# EAGLE board attiny85 (EAGLE 7.6.0)
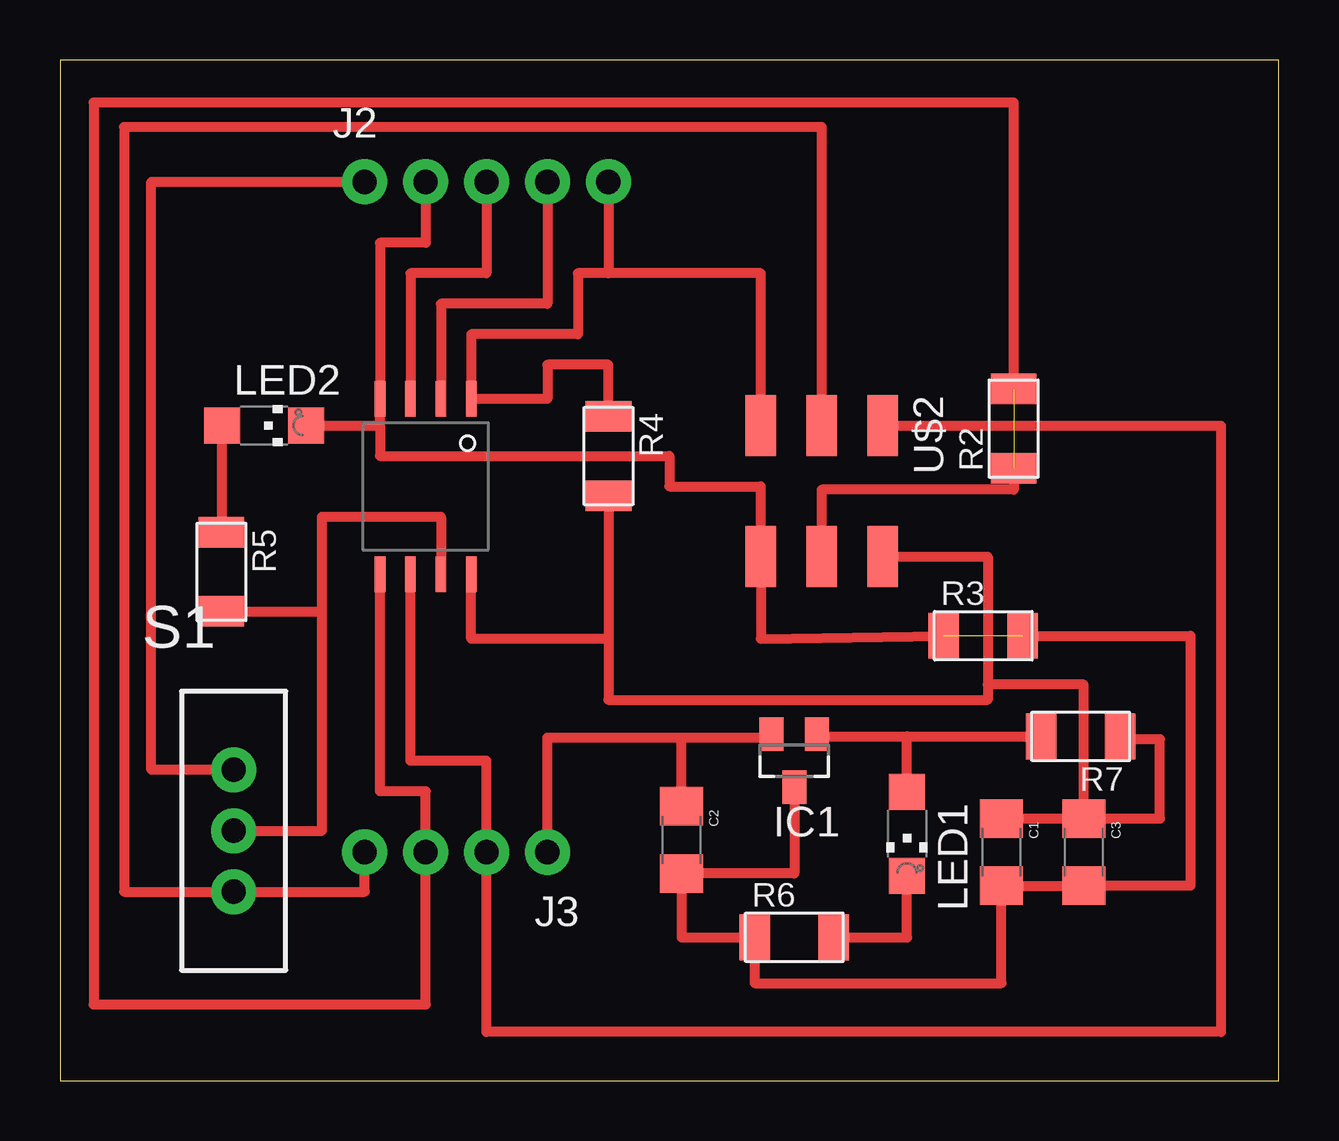
[diagram p0: board, top side]

Size 50.8 x 42.54 mm. Coordinates in mm from the lower left corner, seen from the top.
Outline: 0,0 50.8,0 50.8,42.54 0,42.54 0,0
Copper layers (1*16): Top 0.035mm / dielectric 1.5mm / Bottom 0.035mm
Design rules "default": minimum track width 10mil, minimum drill 24mil, track to track 8mil, track to pad 8mil, pad to pad 8mil, via to via 8mil, smd to smd 8mil, copper to edge 40mil, drill to drill 8mil, minimum pad ring 10mil, minimum via ring 8mil, stop-mask expansion 4mil, vias tented up to drill 0mil, thermal gap 10mil

## Footprints (pad centres in the part's own frame; a part is rotated, then mirrored left to right if it is on the bottom)
1206 = smd 1.6 x 1.8: 1 -1.4,0; 2 1.4,0
SOT23 = smd 1 x 1.4: 1 -0.95,-1.1; 2 0.95,-1.1; 3 0,1.1
1X05_NO_SILK = drill 1.016 pad 1.88: 1 0,0; 2 2.54,0; 3 5.08,0; 4 7.62,0; 5 10.16,0
1X04_NO_SILK_ALL_ROUND = drill 1.016 pad 1.88: 1 0,0; 2 2.54,0; 3 5.08,0; 4 7.62,0
CHIPLED_1206 = smd 1.5 x 1.5: A 0,-1.75; C 0,1.75
R1206FAB = smd 1.27 x 1.905: 1 -1.651,0; 2 1.651,0
SWITCH-SPDT = drill 1.016 pad 1.88: 1 0,2.54; 2 0,0; 3 0,-2.54
8S2_EIAJ-85 = smd 0.457 x 1.48: 1 1.905,3.65; 2 0.635,3.65; 3 -0.635,3.65; 4 -1.905,3.65; 5 -1.905,-3.65; 6 -0.635,-3.65; 7 0.635,-3.65; 8 1.905,-3.65
2X03SMD = smd 2.54 x 1.27: 1 -2.54,2.54; 2 2.92,2.54; 3 -2.54,0; 4 2.92,0; 5 -2.54,-2.54; 6 2.92,-2.54

## Placement (x,y rotation side)
C1  [1206]  39.24,9.52 270 top
C2  [1206]  25.91,10.03 270 top
C3  [1206]  42.67,9.52 270 top
IC1  [SOT23]  30.61,13.33 180 top
J2  [1X05_NO_SILK]  12.7,37.46 0 top
J3  [1X04_NO_SILK_ALL_ROUND]  20.32,9.52 180 top
LED1  [CHIPLED_1206]  35.31,10.29 180 top
LED2  [CHIPLED_1206]  8.51,27.3 270 top
R2  0  [R1206FAB]  39.75,27.18 90 top
R3  0  [R1206FAB]  38.48,18.54 0 top
R4  10k  [R1206FAB]  22.86,26.04 270 top
R5  1k  [R1206FAB]  6.73,21.21 270 top
R6  10k  [R1206FAB]  30.61,5.97 0 top
R7  0  [R1206FAB]  42.54,14.35 180 top
S1  [SWITCH-SPDT]  7.24,10.41 0 top
U$1  ATTINY85EIAJ  [8S2_EIAJ-85]  15.24,24.77 0 top
U$2  AVRISPSMD  [2X03SMD]  31.75,24.77 270 top

## Library data of the parts
C1-C3 = SparkFun-Capacitors
IC1 R2-R7 U$2 = fab
J2 = SparkFun-Connectors
J3 = SparkFun-Connectors; PROD_ID: CONN-09696
LED1 LED2 = led
S1 = SparkFun-Electromechanical; PROD_ID: SWCH-08261
U$1 = SparkFun-DigitalIC

## Nets
ADC0: J2.4 U$1.2
ADC1: J2.3 U$1.3
ADC2: J2.1 S1.1
GND: C1.2 C2.2 C3.2 IC1.3 J2.2 LED2.C R3.1 R3.2 R6.1 U$1.4 U$2.6
MISO: J3.2 U$1.6 U$2.1
MOSI: J3.3 R2.1 R2.2 U$1.5 U$2.4
N$2: IC1.1 LED1.A R7.2
N$3: LED1.C R6.2
N$4: LED2.A R5.1
PB2: R5.2 S1.2 U$1.7
RAW: C2.1 IC1.2 J3.1
RESET: J2.5 R4.1 U$1.1 U$2.5
SCK: J3.4 S1.3 U$2.3
VCC: C1.1 C3.1 R4.2 R7.1 U$1.8 U$2.2

## Tracks (layer width: path | path; a pad name or v marks a point on that pad's centre or on a via)
ADC0
  Top 0.406: J2.4 20.32,32.38 15.87,32.38 U$1.2
ADC1
  Top 0.406: J2.3 17.78,33.65 14.6,33.65 U$1.3
ADC2
  Top 0.406: J2.1 3.81,37.46 3.81,12.95 S1.1
GND  (1 unrouted)
  Top 0.406: J2.2 15.24,34.92 13.33,34.92 U$1.4 13.33,27.3 | LED2.C 13.33,27.3 | 13.33,27.3 13.33,26.04 25.4,26.04 25.4,24.77 29.21,24.77 U$2.6 29.21,18.42 R3.1 | R3.2 47.12,18.54 47.12,8.12 C3.2 C1.2 39.24,4.06 28.96,4.06 R6.1 | 30.61,8.64 30.61,8.63 C2.2 25.91,8.38 | R6.1 27.05,5.97 25.91,5.97 | IC1.3 30.61,8.64 | 30.61,8.64 26.04,8.64 26.04,8.38 25.91,8.38 | 25.91,8.38 25.91,5.97 | 25.91,5.97 R6.1
MISO
  Top 0.406: U$1.6 14.6,13.33 17.78,13.33 J3.2 17.78,2.03 48.39,2.03 48.39,27.3 U$2.1
MOSI  (1 unrouted)
  Top 0.406: 13.33,20.96 U$1.5 13.33,12.06 15.24,12.06 J3.3 15.24,3.17 1.4,3.17 1.4,40.77 39.75,40.77 R2.2 | U$2.4 31.75,24.64 39.75,24.64 R2.1
N$2
  Top 0.406: IC1.1 31.56,14.35 35.31,14.35 | 35.31,14.35 R7.2 | LED1.A 35.31,14.35
N$3
  Top 0.406: R6.2 35.31,5.97 LED1.C
N$4
  Top 0.406: LED2.A 6.73,27.3 R5.1
PB2
  Top 0.406: U$1.7 15.87,23.5 10.92,23.5 10.92,19.56 | S1.2 10.92,10.41 10.92,19.56 | R5.2 10.92,19.56
RAW
  Top 0.406: J3.1 20.32,14.29 25.91,14.29 | C2.1 25.91,14.29 | IC1.2 29.66,14.29 25.91,14.29
RESET
  Top 0.406: U$2.5 29.21,33.65 22.86,33.65 | 22.86,33.65 21.59,33.65 21.59,31.12 17.14,31.12 U$1.1 20.32,28.42 20.32,29.85 22.86,29.85 R4.1 | J2.5 22.86,33.65
SCK
  Top 0.406: U$2.3 31.75,39.75 2.67,39.75 2.67,7.87 S1.3 12.7,7.87 J3.4
VCC
  Top 0.406: 17.14,20.96 U$1.8 17.14,18.42 22.86,18.42 R4.2 22.86,15.87 38.68,15.87 38.68,16.51 | U$2.2 38.68,21.85 38.68,16.51 | C3.1 45.85,10.92 45.85,14.22 44.2,14.22 R7.1 | C1.1 C3.1 | C3.1 42.67,16.51 38.68,16.51